# Altium PCB Untitled1.PcbDoc
Units mil, origin at the board's own origin, x right, y up, seen from the top; angles counter-clockwise.
Board outline 11800 x 5800 mil, 2 copper layers (Top Layer, Top, Bottom Layer, Bottom); 17 components, 14 nets, 43 pads, 3 vias.
Unrouted connection lines stored in the file: 4.
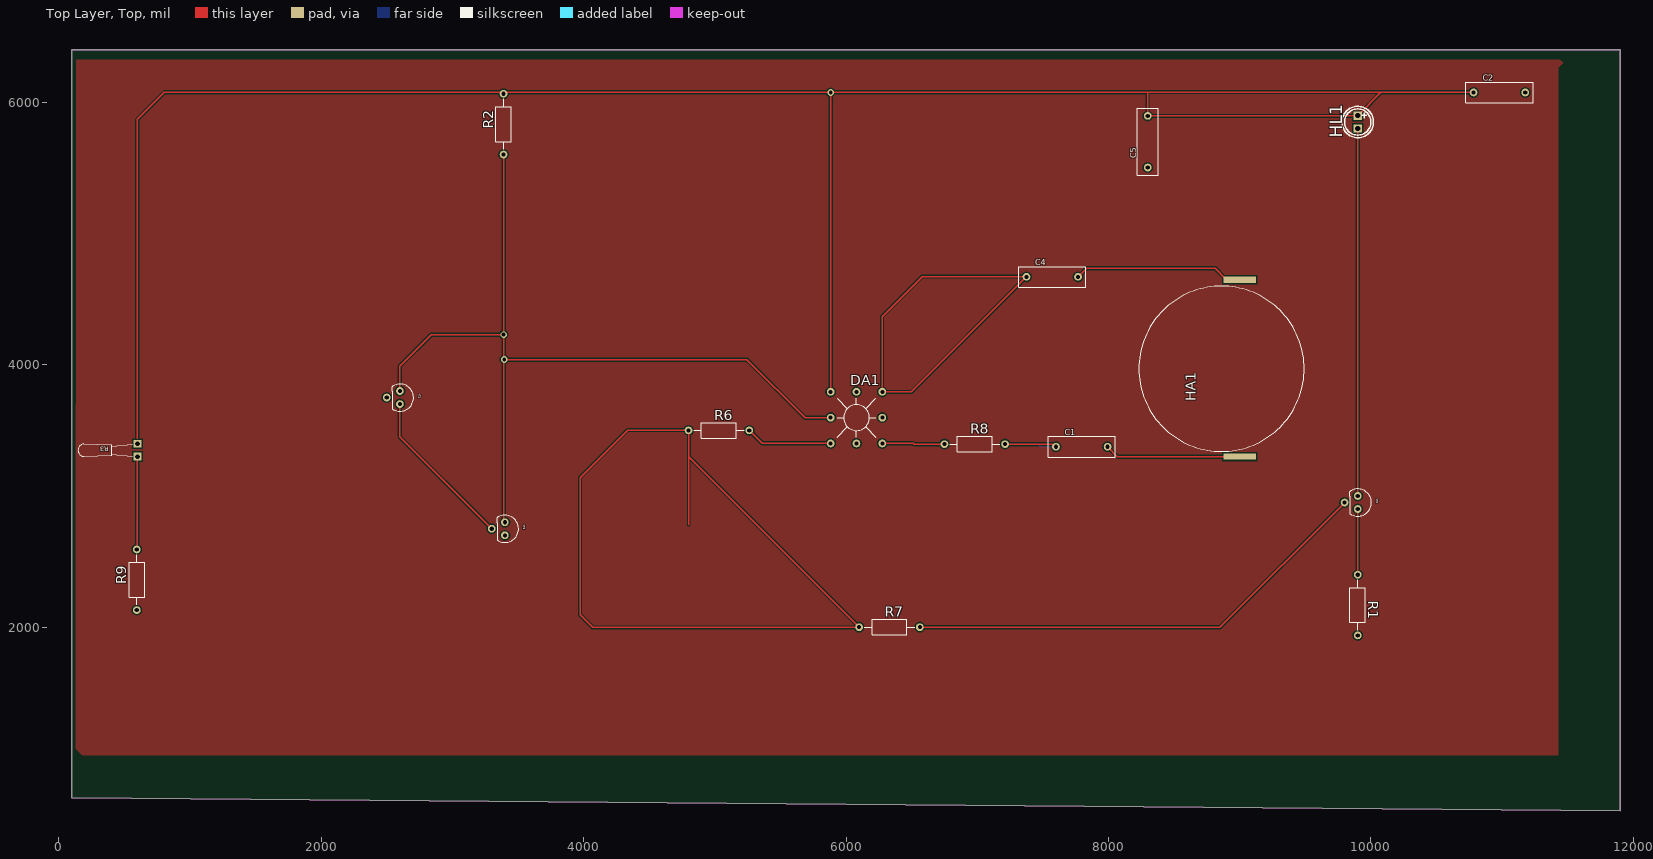
[diagram p0: Top Layer, Top view]
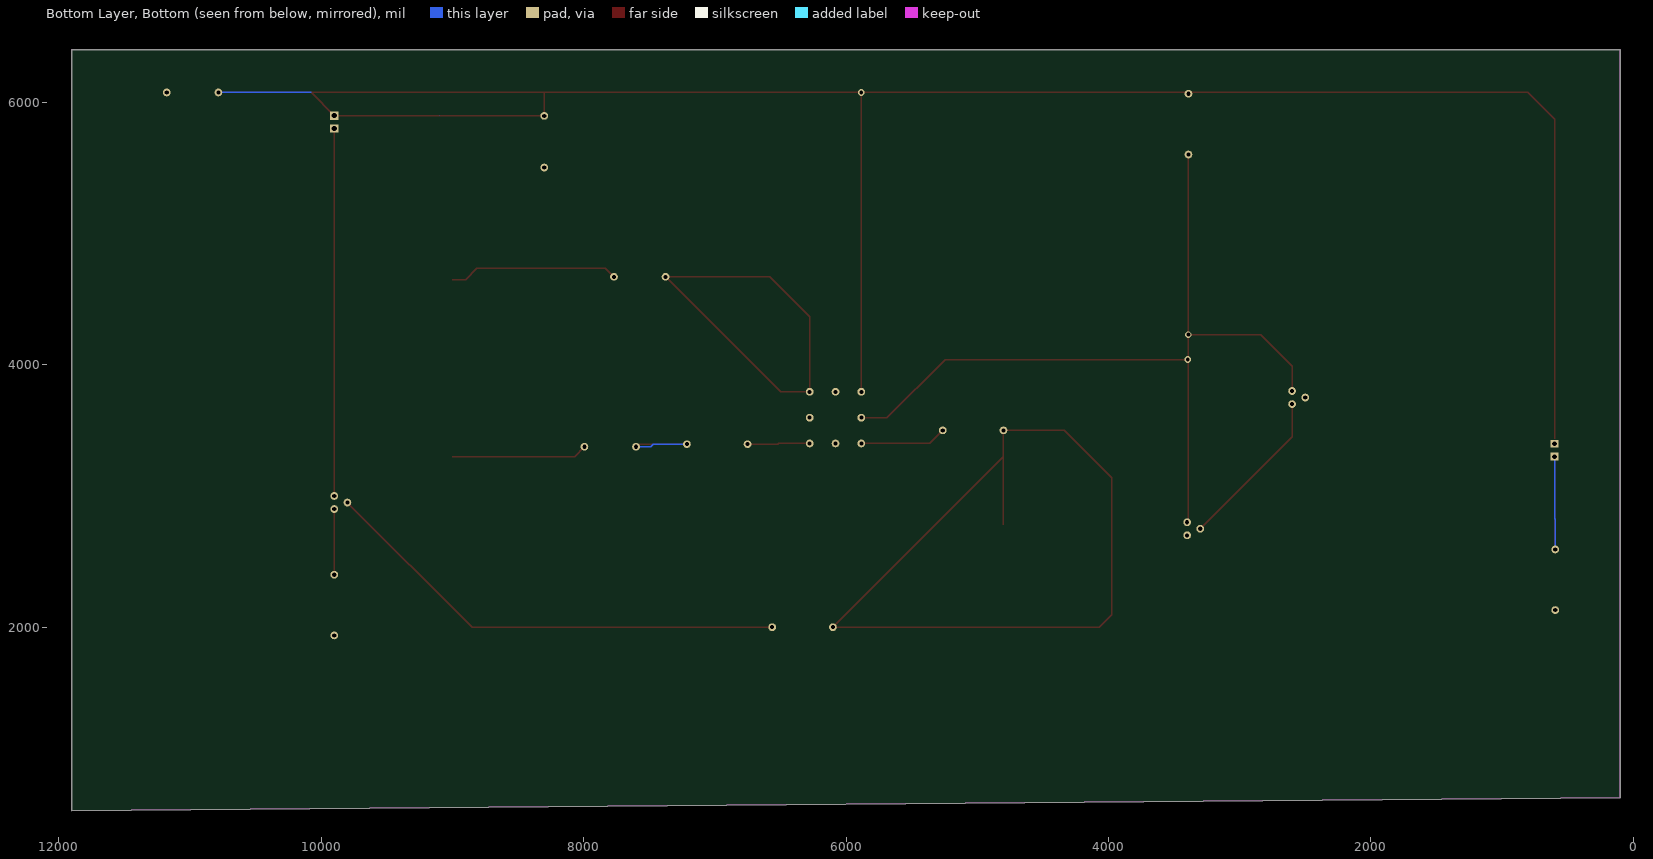
[diagram p1: Bottom Layer, Bottom view, seen from below]

## Layer stack, top to bottom
Top Solder, Top Mask: solder mask 0.4, Solder Resist, Dk 3.5
Top Layer, Top: signal copper 1.4
Dielectric 1: dielectric 12.6, FR-4, Dk 4.8
Bottom Layer, Bottom: signal copper 1.4
Bottom Solder, Bot Mask: solder mask 0.4, Solder Resist, Dk 3.5

## Board outline
100,6400 100,700 11900,600 11900,6400

## Design rules (kind name [scope] priority, off if disabled: settings)
Clearance [All] p1: gap=10 ignorepadtopadclearanceinfootprint=FALSE except(12: Arc-Arc Arc-Track Arc-THPad Arc-Via Track-Track Track-THPad Track-Via THPad-THPad THPad-Via Via-Via)
PlaneClearance [All] p1: clearance=10
PolygonConnect [All] p1: connectstyle=Relief reliefconductorwidth=10 reliefentries=4 polygonreliefangle="90 Angle" airgapwidth=10
RoutingVias [All] p1: holewidth=28 width=50 viastyle="Through Hole" minholewidth=28 minwidth=50 maxholewidth=28 maxwidth=50
SolderMaskExpansion [All] p1: expansion=4 istentingtop=FALSE
Width [All] p1: maxlimit=10 minlimit=10 preferedwidth=10
29 further rules are at their usual default settings.

## Components (designator, comment, footprint, x,y, rotation, side; value= is the part's Value field where it differs from the comment)
C1 "" B32921(13X4) 7796.85,3375 r0 top
C2 "" B32921(13X4) 10980,6075 r0 top
C4 "" B32921(13X4) 7571.85,4670 r0 top
C5 "" B32921(13X4) 8300,5700 r90 top
DA1 "" 301.8-2 6276.85,3793.7 r0 top
HA1 "" ЗП-1 9000,3300 r90 top
HL1 "" AL307 9900,5800 r90 top
R1 "" C2-33H-0.25W 9900,2400 r270 top
R2 "" C2-33H-0.25W 3390,5602.4 r90 top
R3 "" B57861 600,3300 r90 top
R6 "" C2-33H-0.25W 4800,3500 r0 top
R7 "" C2-33H-0.25W 6100,2000 r0 top
R8 "" C2-33H-0.25W 6750,3395 r0 top
R9 "" C2-33H-0.25W 595,2130 r90 top
VT2 "" TO-92-1 9900,3000 r270 top
VT3 "" TO-92-1 3400,2800 r270 top
VT4 "" TO-92-1 2600,3800 r270 top

## Footprints (in the part's own frame and the unit in brackets; to place one, negate y for a bottom-side part, rotate by r counter-clockwise, add the part's x,y. Pads: shape width x height; smd on the part's side, far side on the other; paste and mask are expansions set on the pad)
301.8-2 [mm]
  round 1.5 hole 0.8: 1(0,0) 2(-5,0) 3(-10,0) 4(-10,-5) 5(-10,-10) 6(-5,-10) 7(0,-10) 8(0,-5)
  silkscreen extent -8.75,-8.75 -1.25,-1.25
AL307 [mm]
  rect 1.6x1.6 hole 1: 1(0,0) 2(2.5,0)
  silkscreen extent -1.78,-3.05 4.32,3.04
B32921(13X4) [mm]
  round 1.5 hole 0.8: 1(-5,0) 2(5,0)
  silkscreen extent -6.5,-2 6.5,2
B57861 [mm]
  rect 1.5x1.5 hole 0.9: 1(0,0) 2(2.5,0)
  silkscreen extent 0.05,0.98 2.45,11.52
C2-33H-0.25W [mm]
  round 1.5 hole 0.8: 1(0,0) 2(11.75,0)
  silkscreen extent 1,-1.5 10.75,1.5
TO-92-1 [mm]
  round 1.5 hole 0.8: 1(0,0) 2(1.27,-2.54) 3(2.54,0)
  silkscreen extent -1.35,-1.5 3.92,2.65
ЗП-1 [mm]
  rect 1.2x6.3 smd: 1(0,0) 2(34.25,0)
  silkscreen extent 1,-12.5 33,19.5

## Via types
v1: diameter 50, hole 28, Top Layer, Top to Bottom Layer, Bottom, 3 vias

## Nets (pads, with @x,y where several pads share a name; then routed paths per layer and width w, separated by ;. In a path a pad name is that pad's centre, name@x,y a point inside that pad or via, vN(x,y) a via of type N, cw(c..) or ccw(c..) an arc to the next point about the centre after c; other vN are vias at no path point)
NET00000: C4.1 DA1.1 | length 1461.1
  Top Layer, Top w10: DA1.1 6498.7,3793.7 C4.1
NET00001: C4.2 HA1.2 | length 1294.1
  Top Layer, Top w10: C4.2 7833.7,4735 8813.03,4735 8899.61,4648.43 HA1.2
NET00002: DA1.7 R8.1 | length 475.2
  Top Layer, Top w10: DA1.7 6514,3400 6519,3395 R8.1
NET00003: C1.1 R8.2 | length 395.7
  Bottom Layer, Bottom w10: R8.2 7468,3395 7488,3375 C1.1
NET00004: C1.2 HA1.1 | length 1037.4
  Top Layer, Top w10: C1.2 8068.7,3300 HA1.1
NET00005: R1.1 VT2.3 | length 500
  Top Layer, Top w10: R1.1 VT2.3
NET00007: R3.1 R9.2 | length 709.5
  Bottom Layer, Bottom w10: R9.2 595,2822 600,2827 R3.1
NET00008: C2.1 C5.2 HL1.2 R2.2 R3.2 | length 2556.9
  Top Layer, Top w10: C5.2 9099,5896.85 ; 9100.58,5898.43 HL1.2 10076.57,6075
  Bottom Layer, Bottom w10: 9099,5896.85 9100.58,5898.43 ; 10076.57,6075 C2.1
NET00009: R2.1 VT3.1 | length 2806.5
  Top Layer, Top w10: VT3.1@3390,2823.27 R2.1
  Bottom Layer, Bottom w10: VT3.1@3390,2823.27 3400,2813.27 VT3.1
  other v1: 3395,4040 3390,4230
NET00010: VT3.2 VT4.3 | length 1239.9
  Top Layer, Top w10: VT4.3 2600,3450 VT3.2
NET00011: DA1.5 R6.2 | length 662
  Top Layer, Top w10: R6.2 5362.6,3400 DA1.5
NET00012: R6.1 R7.1 | length 2038.5
  Top Layer, Top w10: R6.1 4800,3300 R7.1
NET00013: R7.2 VT2.2 | length 3630.9
  Top Layer, Top w10: R7.2 8850,2000 VT2.2
NET00014: HL1.1 VT2.1 | length 2800
  Top Layer, Top w10: VT2.1 HL1.1
pads on no net: C2.2 C5.1 DA1.2 DA1.3 DA1.4 DA1.6 DA1.8 R1.2 R9.1 VT3.3 VT4.1 VT4.2
copper on no net: | length 27878.9
  Top Layer, Top w10: 600,2597.6 600,3300 ; 600,3435 600,5870 805,6075 10783.15,6075 ; 2600,3800 2600,3990 2840,4230 3400,4230 ; 3395,4040 5245,4040 5688.15,3596.85 5883.15,3596.85 ; 4800,2780 4800,3300 ; 4800,3500 4335,3500 3975,3140 3975,2095 4070,2000 6085,2000 ; 5883.15,3793.7 v1(5883.15,6075) ; 6276.85,3806.85 6276.85,4366.85 6580,4670 7375,4670 ; 7212.6,3395 7570,3395 7590,3375 ; 8300,5896.85 8300,6070 ; 9900,3000 9900,4400

## Polygon pours and split planes (outlines as drawn)
no net on Top Layer, Top "NONET_L01_P000" (solid, pour order 0): 135,6325 11440,6325 11465,6300 11430,6265 11430,1025 180,1025 130,1075

## Keep-outs
Keep-Out Layer, Board:
  the board outline again, w5

## Text inside footprints (layer, text, board x,y; h text height)
VT2: Mechanical 1, Top Assy "BASE" at 9850.79,2970.47 h12.3 r270; Mechanical 1, Top Assy "E" at 9931.1,3027.95 h12.3 r270; Mechanical 1, Top Assy "C" at 9931.1,2909.84 h12.3 r270
VT3: Mechanical 1, Top Assy "C" at 3431.1,2709.84 h12.3 r270; Mechanical 1, Top Assy "E" at 3431.1,2827.95 h12.3 r270; Mechanical 1, Top Assy "BASE" at 3350.79,2770.47 h12.3 r270
VT4: Mechanical 1, Top Assy "C" at 2631.1,3709.84 h12.3 r270; Mechanical 1, Top Assy "E" at 2631.1,3827.95 h12.3 r270; Mechanical 1, Top Assy "BASE" at 2550.79,3770.47 h12.3 r270